# Altium PCB PCB1.PcbDoc
Units mil, origin at the board's own origin, x right, y up, seen from the top; angles counter-clockwise.
Board outline 1860 x 2320 mil, 2 copper layers (Top Layer, Bottom Layer); 16 components, 11 nets, 65 pads, 6 vias.
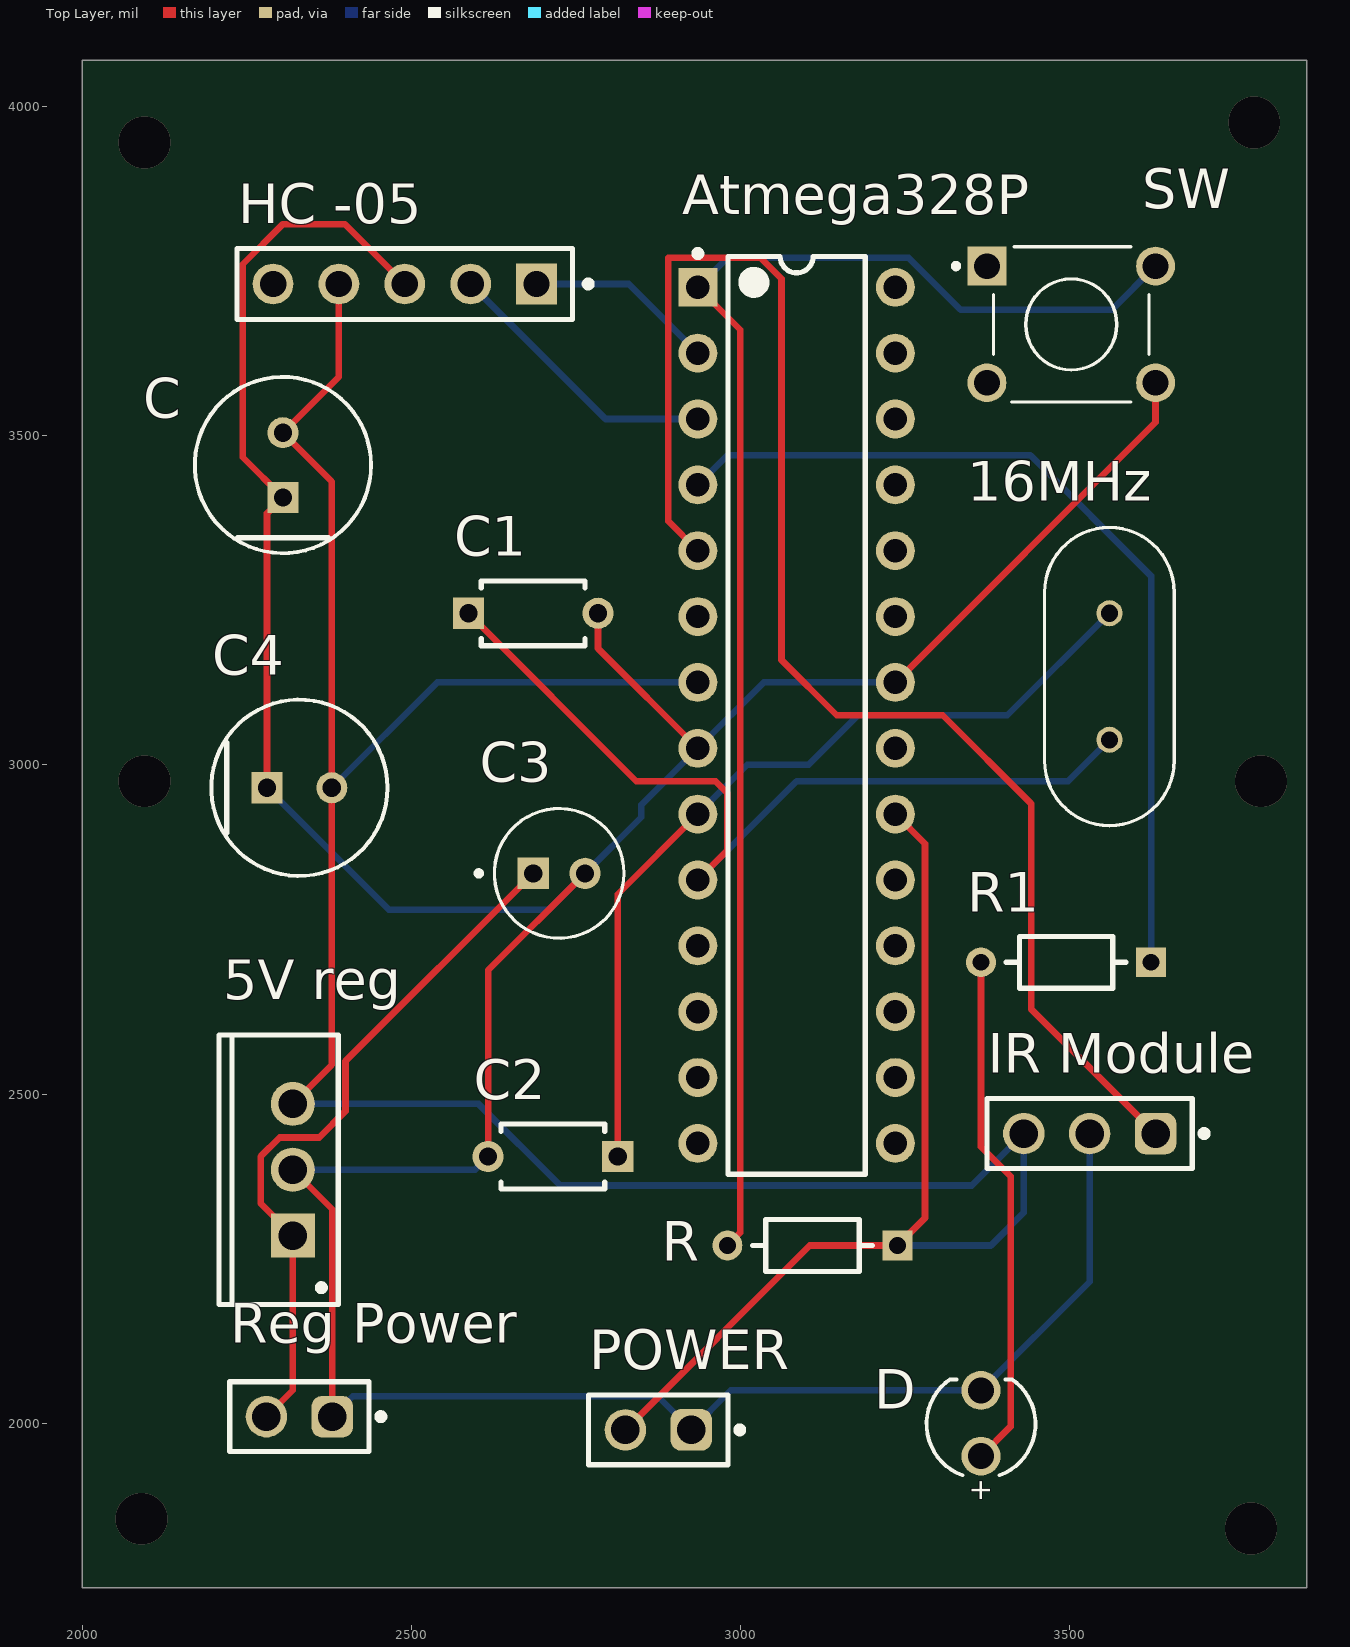
[diagram p0: Top Layer view]
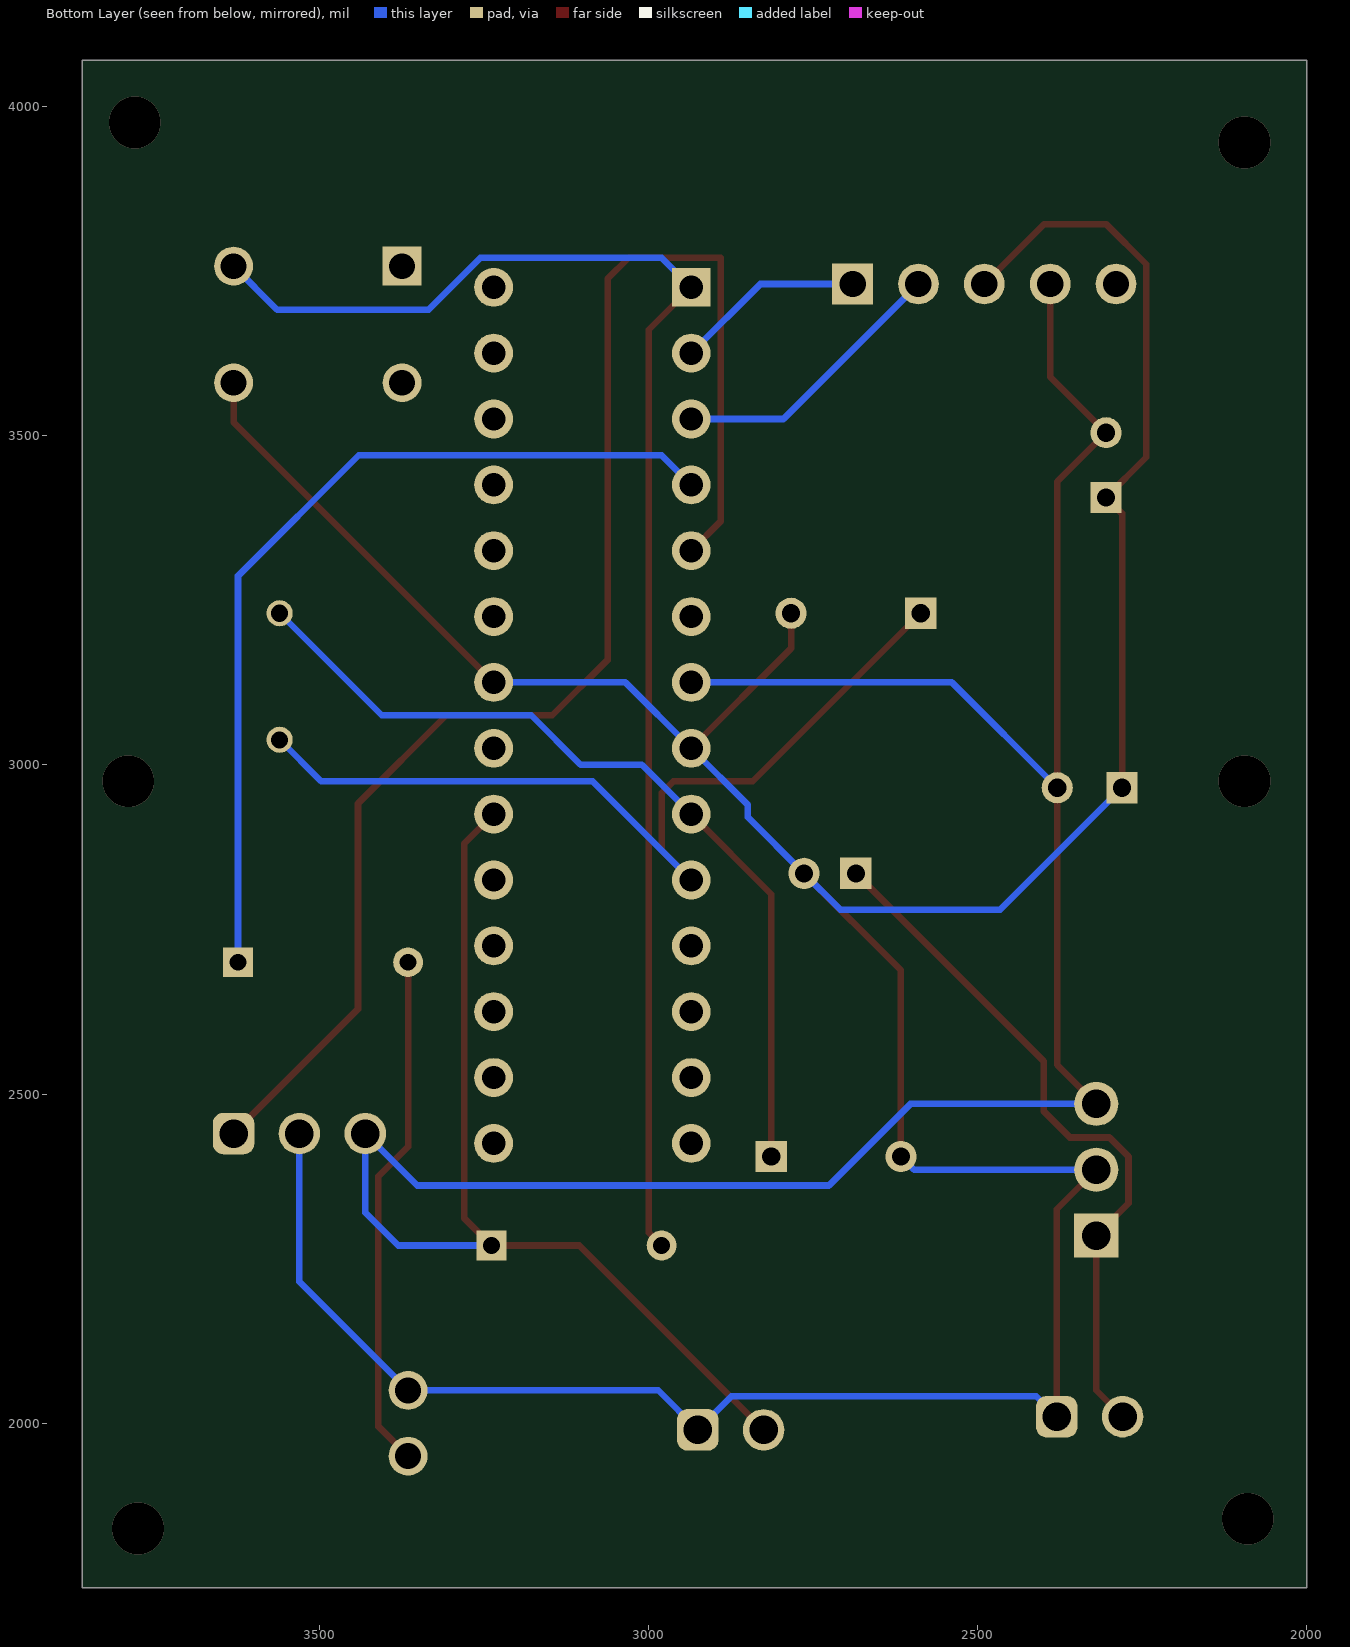
[diagram p1: Bottom Layer view, seen from below]
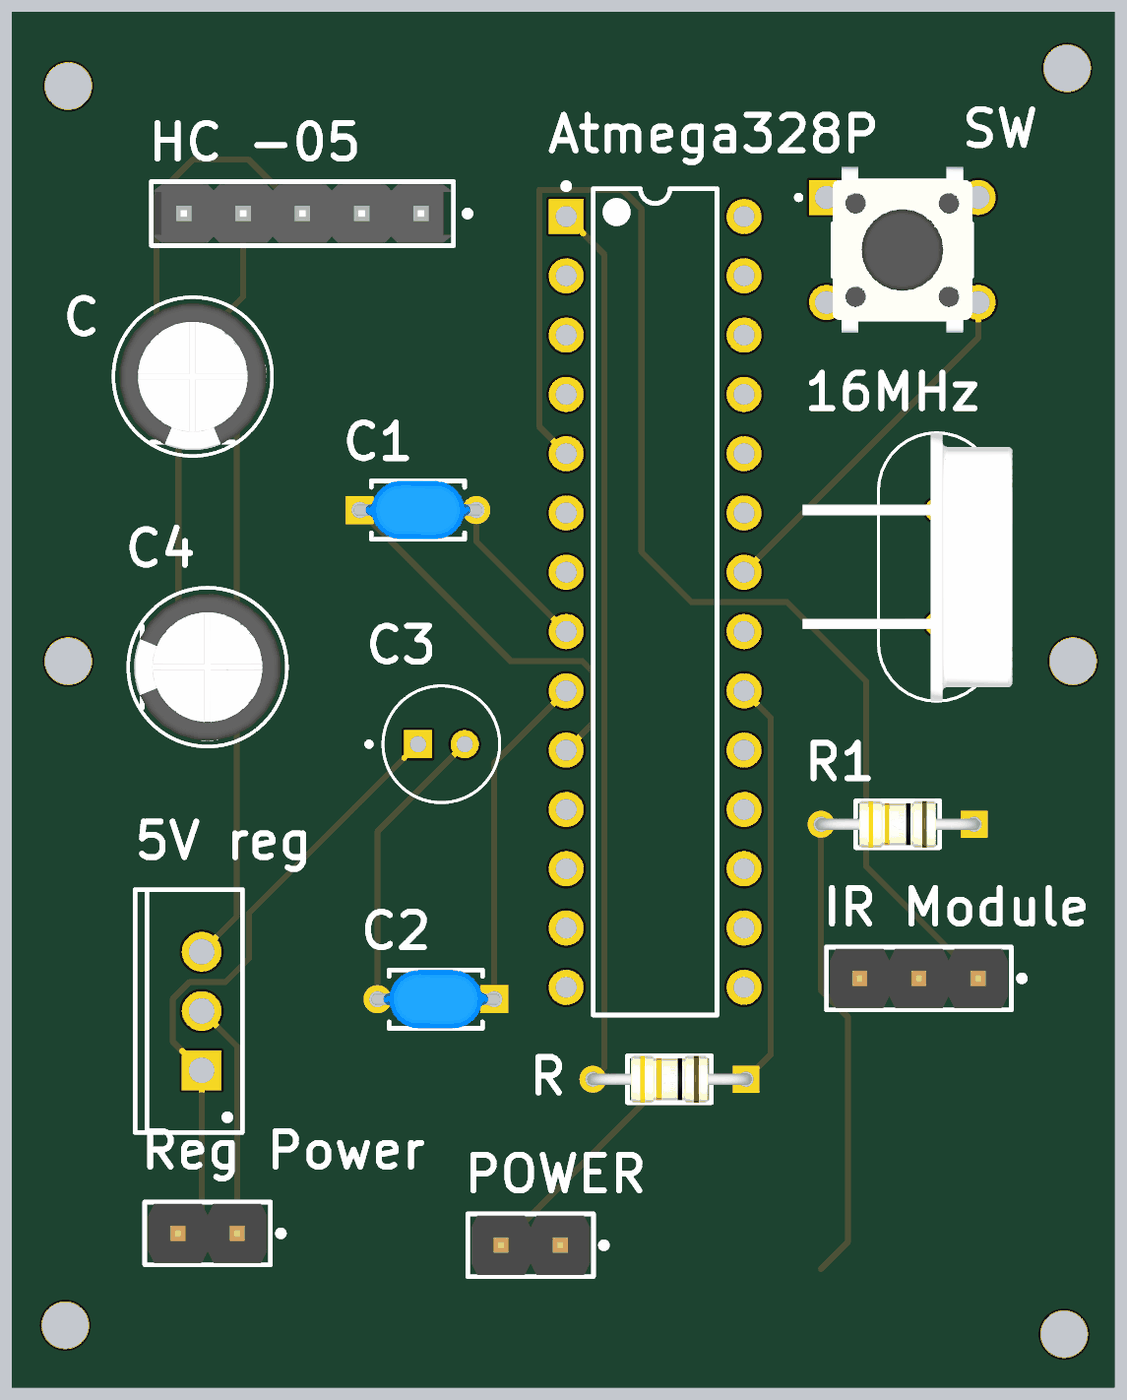
[diagram p2: 3D render of the assembled board from above, using the file's embedded part models]

## Layer stack, top to bottom
Top Solder: solder mask 0.4, Solder Resist, Dk 3.5
Top Layer: signal copper 1.4
Dielectric 1: dielectric 12.6, FR-4, Dk 4.8
Bottom Layer: signal copper 1.4
Bottom Solder: solder mask 0.4, Solder Resist, Dk 3.5

## Board outline
2000,1750 3860,1750 3860,4070 2000,4070

## Design rules (kind name [scope] priority, off if disabled: settings)
Clearance [All] p1: gap=10 ignorepadtopadclearanceinfootprint=FALSE
PolygonConnect [All] p1: connectstyle=Relief reliefconductorwidth=10 reliefentries=4 polygonreliefangle="90 Angle" airgapwidth=10
RoutingVias [All] p1: holewidth=28 width=50 viastyle="Through Hole" minholewidth=28 minwidth=50 maxholewidth=28 maxwidth=50
SolderMaskExpansion [All] p1: expansion=4 istentingtop=FALSE
Width [All] p1: maxlimit=10 minlimit=10 preferedwidth=10
30 further rules are at their usual default settings.

## Components (designator, comment, footprint, x,y, rotation, side; value= is the part's Value field where it differs from the comment)
"5V reg" "L7805CV" TO220 2320,2385 r90 top
16MHz "ABL-16.000MHZ-B2" XTAL_HC49P488W46L1150T500H350 3560,3133.94 r90 top
Atmega328P "ATmega328P-PU" 28P3 3085,3075 r0 top
C "0.1uF" FP-RAD-TH-D_6_3_0_5-L_11-MFG 2305,3455 r90 top
C1 "RDE5C2A220J0M1H03A" FP-RDE0M1-MFG 2685,3230 r0 top
C2 "RDE5C2A220J0M1H03A" FP-RDE0M1-MFG 2715,2405 r180 top
C3 "0.33uF" CAPPRD200W50D550H1250 2724.37,2835 r0 top
C4 "0.1uF" FP-RAD-TH-D_6_3_0_5-L_11-MFG 2330,2965 r0 top
D "151031VS06000" WL-TMRC_D3.95H5.3 -46635,52000 r90 top
"HC -05" "22-28-4050" FP-22-28-4050-MFG 2490,3730 r180 top
"IR Module" "61300311121" 61300311121 3530,2440 r180 top
POWER "61300211121" 61300211121 2875,1990 r180 top
R "10k" FP-CF18-MFG 3109.13,2270 r180 top value=10kΩ
R1 "CF18JT10K0" FP-CF18-MFG 3494.13,2700 r180 top value=10kΩ
"Reg Power" "61300211121" 61300211121 2330,2010 r180 top
SW "1825910-6" SW_1825910-6-4 3502.05,3668.58 r0 top

## Footprints (in the part's own frame and the unit in brackets; to place one, negate y for a bottom-side part, rotate by r counter-clockwise, add the part's x,y. Pads: shape width x height; smd on the part's side, far side on the other; paste and mask are expansions set on the pad)
28P3 [mm] "28-Pin Plastic Dual In-Line Package (PDIP)"
  rect 1.5x1.5 hole 0.9: 1(-3.81,16.51)
  round 1.5 hole 0.9: 2(-3.81,13.97) 3(-3.81,11.43) 4(-3.81,8.89) 5(-3.81,6.35) 6(-3.81,3.81) 7(-3.81,1.27) 8(-3.81,-1.27) 9(-3.81,-3.81) 10(-3.81,-6.35) 11(-3.81,-8.89) 12(-3.81,-11.43) 13(-3.81,-13.97) 14(-3.81,-16.51) 15(3.81,-16.51) 16(3.81,-13.97) 17(3.81,-11.43) 18(3.81,-8.89) 19(3.81,-6.35) 20(3.81,-3.81) 21(3.81,-1.27) 22(3.81,1.27) 23(3.81,3.81) 24(3.81,6.35) 25(3.81,8.89) 26(3.81,11.43) 27(3.81,13.97) 28(3.81,16.51)
  silkscreen extent -3.93,-17.7 2.65,17.93, body extent -3.6,-17.65 3.6,17.65, height 4.58
61300211121 [mm] "Pin Header, pitch 2.54 mm, THT, Vertical, single row, 2p"
  rrect50% 1.6x1.6 hole 1.1: 1(-1.27,0)
  round 1.6 hole 1.1: 2(1.27,0)
  silkscreen extent -3.26,-1.34 2.69,1.34, body extent -2.54,-1.27 2.54,1.27, height 8.57
61300311121 [mm] "Pin Header, pitch 2.54 mm, THT, Vertical, single row, 3p"
  rrect50% 1.6x1.6 hole 1.1: 1(-2.54,0)
  round 1.6 hole 1.1: 2(0,0) 3(2.54,0)
  silkscreen extent -4.53,-1.34 3.96,1.34, body extent -3.81,-1.27 3.81,1.27, height 8.57
CAPPRD200W50D550H1250 [mm]
  rect 1.208x1.208 hole 0.7: 1(-1,0)
  round 1.208 hole 0.7: 2(1,0)
  silkscreen extent -3.2,-2.5 2.5,2.5
FP-22-28-4050-MFG [mm]
  rect 1.57x1.57 hole 1.02 paste-2539.97 mask+0: 1(-5.08,0)
  round 1.57 hole 1.02 paste-2539.97 mask+0: 2(-2.54,0) 3(0,0) 4(2.54,0) 5(5.08,0)
  silkscreen extent -7.2,-1.37 6.48,1.37, body extent -6.58,-1.47 6.58,1.47, height 0.25
FP-CF18-MFG [mm]
  rect 1.15x1.15 hole 0.65 paste-2539.97 mask+0: 1(-3.28,0)
  round 1.15 hole 0.65 paste-2539.97 mask+0: 2(3.28,0)
  silkscreen extent -2.31,-1 2.3,1, body extent -3.96,-1.1 3.96,1.1, height 0.25
FP-RAD-TH-D_6_3_0_5-L_11-MFG [mm]
  rect 1.2x1.2 hole 0.7 paste-2539.97 mask+0: 1(-1.25,0)
  round 1.2 hole 0.7 paste-2539.97 mask+0: 2(1.25,0)
  silkscreen extent -3.4,-3.4 3.4,3.4, body extent -3.5,-3.5 3.5,3.5, height 0.25
FP-RDE0M1-MFG [mm]
  rect 1.2x1.2 hole 0.7 paste-2539.97 mask+0: 1(-2.5,0)
  round 1.2 hole 0.7 paste-2539.97 mask+0: 2(2.5,0)
  silkscreen extent -2,-1.25 2,1.25, body extent -3.2,-1.35 3.2,1.35, height 0.25
SW_1825910-6-4 [mm]
  rect 1.498x1.498 / inner round 1.498 / far side rect 1.498x1.498 hole 0.99: 1(-3.25,2.25)
  round 1.498 hole 0.99: 2(3.25,2.25) 3(-3.25,-2.25) 4(3.25,-2.25)
  silkscreen extent -4.54,-2.99 3,2.99, body extent -3,-3.9 3,3.9, height 5.01
TO220 [mm] "TO, Thru-Hole, Vertical, Heatsink Mounted; 3 In-Line Leads; Pitch 2.54 mm"
  rect 1.7x1.7 hole 1.1: 1(-2.54,0)
  round 1.7 hole 1.1: 2(0,0) 3(2.54,0)
  silkscreen extent -5.2,-1.75 5.2,2.85, body extent -5.25,-1.8 5.25,2.9, height 19.7
WL-TMRC_D3.95H5.3 [mm] "THT Mono-color Round Color LED, 2-leads"
  round 1.5 hole 1: 1(-1271.27,-1270) 2(-1268.73,-1270)
  silkscreen extent -1272,-1272.1 -1268.31,-1267.9, body extent -1271.99,-1271.97 -1268.37,-1268.03, height 5.35
XTAL_HC49P488W46L1150T500H350 [mm]
  round 1.007 hole 0.657: 1(-2.44,0) 2(2.44,0)
  silkscreen extent -5.75,-2.5 5.75,2.5, body extent -5.75,-3.25 5.75,5.75, height 2.5

## Part data
"5V reg": library part CMP-0244-00483-1, "Positive Voltage Regulator, 5V, 3-Pin TO-220", ComponentLink1Description="Manufacturer URL", ComponentLink1URL=http://www.st.com, ComponentLink2Description=Datasheet, ComponentLink2URL=http://www.st.com/internet/com/TECHNICAL_RESOURCES/TECHNICAL_LITERATURE/DATASHEET/CD00000444.pdf, ComponentLink3Description="Package Specification", ComponentLink3URL=http://www.st.com/internet/com/TECHNICAL_RESOURCES/TECHNICAL_LITERATURE/PACKAGE_INFORMATION/CD00004649.pdf, DatasheetVersion=16/11/2011, PackageDescription="TO, Thru-Hole, Vertical, Heatsink Mounted; 3 In-Line Leads; Pitch 2.54 mm", PackageReference=TO220, PackageVersion=ver3.0
16MHz: "HC/49US (AT49) MICROPROCESSOR CRYSTAL", Package="HC-49/US ABRACON", Availability="In Stock", Check_prices=https://www.snapeda.com/parts/ABL-16.000MHZ-B2/Abracon+LLC/view-part/?ref=eda, MF=Abracon, MP=ABL-16.000MHZ-B2, Price=None, Purchase-URL=https://pricing.snapeda.com/search/part/ABL-16.000MHZ-B2/?ref=eda, SnapEDA_Link=https://www.snapeda.com/parts/ABL-16.000MHZ-B2/Abracon+LLC/view-part/?ref=snap
Atmega328P: library part CMP-0095-00013-2, "8-bit AVR Microcontroller, 32KB Flash, 1KB EEPROM, 2KB SRAM, 28-pin PDIP, Industrial Grade (-40°C to 85°C)", ComponentLink1Description="Manufacturer URL", ComponentLink1URL=http://www.atmel.com/, ComponentLink2Description="ATmega48A/48PA/88A/88PA/168A/168PA/328/328P Datasheet", ComponentLink2URL=http://www.atmel.com/dyn/resources/prod_documents/8271.pdf, ComponentLink3Description="ATmega48A/48PA/88A/88PA/168A/168PA/328/328P Summary", ComponentLink3URL=http://www.atmel.com/dyn/resources/prod_documents/8271S.pdf, DatasheetVersion="revD, May-2011", PackageDescription="28-lead (0.300\"/7.62mm Wide) Plastic Dual Inline Package (PDIP)", PackageReference=28P3, PackageVersion="revB, Sep-2001", RevisionNote="DatasheetVersion updated. URLs added."
C C4: library part CMP-05427-001214-1, "Aluminum Electrolytic Capacitors (Radial Lead Type) 330uF ±20% 6.3V", Capacitance=330uF, Case/Package=Radial, ESR (Equivalent Series Resistance)=130mR, Max Operating Temperature=105°C, Min Operating Temperature=-40°C, Package Quantity=2000, Ripple Current=455mA, Tolerance=20%, Voltage Rating=6.3V, Diameter=6.3mm, Features="General Purpose", Height=11.2mm, Height - Seated (Max)=0.5inch, Impedance=130mR, Lead Diameter=0.5mm, Lead Pitch=5mm, Length=11.2mm, Life (Hours)=2000Hour, Mount="Through Hole", Packaging="Ammo Pack", Polarity=Polar, Radiation Hardening=No, RoHS Compliant=Yes, Series=FR, Termination=Radial, Voltage Rating (DC)=6.3V
C1 C2: library part CMP-06035-022985-1, "Ceramic Capacitor 22pF ±5% 100V C0G Radial", Capacitance=22pF, Case/Package=Radial, Dielectric=C0G, Max Operating Temperature=125°C, Min Operating Temperature=-55°C, Package Quantity=1, Resistor Type=Ceramic, Tolerance=5%, Voltage Rating=100V, Height=3.5mm, Height - Seated (Max)=0.236inch, Lead Diameter=0.5mm, Lead Free="Lead Free", Lead Pitch=0.197inch, Length=0.157inch, Mount="Through Hole", Packaging="Cut Tape", Termination=Radial, Voltage Rating (DC)=100V, Width=0.098inch
C3: library part UVR2AR33MDD, "CAP ALUM 0.33UF 20% 100V RADIAL", Package="Radial Nichicon", Availability=Warning, Check_prices=https://www.snapeda.com/parts/UVR2AR33MDD/Nichicon/view-part/2320026/?ref=eda, DigiKey-Purchase-URL=https://snapeda.com/shop?store=DigiKey&id=2320026, MF=Nichicon, Mouser-Purchase-URL=https://snapeda.com/shop?store=Mouser&id=2320026, MP=UVR2AR33MDD, Price=None, SnapEDA_Link=https://www.snapeda.com/parts/UVR2AR33MDD/Nichicon/view-part/2320026/?ref=snap
D: library part CMP-1488-00004-2, Case/Package=Radial, Color=Green, Forward Current=100mA, Forward Voltage=2.2V, Max Operating Temperature=85°C, Max Reverse Voltage (DC)=5V, Min Operating Temperature=-40°C, Test Current=20mA, Dominant Wavelength=568nm, Height=5.3mm, Lead Free="Lead Free", Length=3mm, Lens Size=3mm, Lens Style="Circular, Diffused, Round", Luminous Intensity=30mcd, Mount="Through Hole", NexarPartId=29717805, Packaging=Bulk, Peak Wavelength=560nm, REACH SVHC=Unknown, RoHS=Compliant, Viewing Angle=60°, Wavelength=568nm, Width=3mm
"HC -05": library part CMP-00257-00278173-1, "22-28-4050 KK® 254 Breakaway Header, Vertical, 5 Circuits, Tin (Sn) Plating, Mating Pin Length 6.09mm", Color=Black, Contact Resistance=20mΩ, Current Rating=4A, Flammability Rating="UL94 V-0", Max Operating Temperature=75°C, Max Voltage Rating (DC)=250.25kV, Min Operating Temperature=0°C, Voltage Rating=250V, Connector Type="Male Pin", Contact Material=Brass, Contact Mating Length=6.096mm, Contact Plating=Tin, Gender=Male, Glow Wire Compliant=Non-compliant, Height=2.29mm, Housing Color=Black, Housing Material=Thermoplastic, Lead Free="Lead Free", Lead Pitch=2.54mm, Length=12.7mm, Mount="Through Hole", NexarPartId=278173, Number of Circuits=5, Number of Contacts=5, Number of Positions=5, Number Of Rows=1, Orientation=Vertical, Packaging=Bulk, Pitch=2.54mm, Radiation Hardening=No, REACH SVHC=Unknown, RoHS=Compliant, Schedule B=8536694040, Termination=Solder, Voltage Rating (DC)=250V, Width=2.49mm
"IR Module": library part CMP-1502-01062-3, Color=Black, Contact Resistance=20mΩ, Current Rating=3A, Max Operating Temperature=105°C, Min Operating Temperature=-40°C, Operating Supply Voltage=250V, Connector Type="Male Pin", Contact Material=Copper, Contact Mating Length=5.9944mm, Contact Plating=Gold, Gender=Male, Height=8.94mm, Lead Free="Lead Free", Lead Pitch=2.54mm, Mount="Through Hole", NexarPartId=32855521, Number of Contacts=3, Number of Pins=3, Number of Positions=3, Number Of Rows=1, Orientation=Vertical, Packaging=Bulk, Pitch=2.54mm, REACH SVHC=Unknown, RoHS=Compliant, Termination=Solder, Voltage Rating=250V
POWER "Reg Power": library part CMP-1712-00002-6, Color=Black, Contact Resistance=20mΩ, Current Rating=3A, Max Operating Temperature=125°C, Min Operating Temperature=-40°C, Operating Supply Voltage=250V, Connector Type="Male Pin", Contact Gender=Male, Contact Material=Copper, Contact Mating Length=5.9944mm, Contact Plating=Gold, Gender=Male, Height=8.94mm, Housing Material=PBT, Lead Free="Lead Free", Lead Pitch=2.54mm, Mount="Through Hole", NexarPartId=20081794, Number of Contacts=2, Number of Pins=2, Number of Positions=2, Number Of Rows=1, Orientation=Vertical, Packaging=Bulk, Pitch=2.54mm, REACH SVHC="No SVHC", RoHS=Compliant, Termination="Through Hole", Voltage Rating=250V
R: library part CMP-26528-000002-1, "RES 10K OHM 1/8W 5% CF AXIAL", Manufacturer="Stackpole Electronics", Manufacturer Part Number=CF18JT10K0, Package=CF18, Power Rating=0.125W, Resistance=10kΩ, Temperature="-55°C to +155°C", Temperature Coefficient=0-500ppm/°C, Temperature Range High=+155°C, Temperature Range Low=-55°C, Tolerance=5%, Voltage Rating=250V, Automotive=No, Category=Res, ComponentLink2Description=Datasheet, ComponentLink2URL=http://www.seielect.com/Catalog/SEI-CF_CFM.pdf, Composition="Carbon Film", Device Class L1="Passive Components", Device Class L2=Resistors, Device Class L3="Through-Hole Resistors", Digikey Description="RES 10K OHM 1/8W 5% CF AXIAL", Height=2mm, Ipc Land Pattern Name=RESAD656W65L360D200, Lead Free=Yes, Octopart=https://octopart.com/cf18jt10k0-stackpole+electronics-19205642, RoHS=TRUE, Series=CF
R1: library part CMP-26528-000002-1, "RES 10K OHM 1/8W 5% CF AXIAL", Manufacturer="Stackpole Electronics", Package=CF18, Power Rating=0.125W, Resistance=10kΩ, Temperature="-55°C to +155°C", Temperature Coefficient=0-500ppm/°C, Temperature Range High=+155°C, Temperature Range Low=-55°C, Tolerance=5%, Voltage Rating=250V, Automotive=No, Category=Res, ComponentLink2Description=Datasheet, ComponentLink2URL=http://www.seielect.com/Catalog/SEI-CF_CFM.pdf, Composition="Carbon Film", Device Class L1="Passive Components", Device Class L2=Resistors, Device Class L3="Through-Hole Resistors", Digikey Description="RES 10K OHM 1/8W 5% CF AXIAL", Height=2mm, Ipc Land Pattern Name=RESAD656W65L360D200, Lead Free=Yes, Manufacturer Part Number=CF18JT10K0, Octopart=https://octopart.com/cf18jt10k0-stackpole+electronics-19205642, RoHS=TRUE, Series=CF
SW: "Switch Push Button OFF (ON) SPST Round Button 0.05A 24VDC Momentary Contact PC Pins Thru-Hole", Package=None, Check_prices=https://www.snapeda.com/parts/1825910-6/TE+Connectivity+ALCOSWITCH+Switches/view-part/?ref=eda, Digi-Key_Part_Number=450-1650-ND, MF="TE Connectivity", MP=1825910-6, Purchase-URL=https://pricing.snapeda.com/search/part/1825910-6/?ref=eda, SnapEDA_Link=https://www.snapeda.com/parts/1825910-6/TE+Connectivity+ALCOSWITCH+Switches/view-part/?ref=snap

## Via types
v1: diameter 78.74, hole 78.74, Top Layer to Bottom Layer, 6 vias

## Nets (pads, with @x,y where several pads share a name; then routed paths per layer and width w, separated by ;. In a path a pad name is that pad's centre, name@x,y a point inside that pad or via, vN(x,y) a via of type N, cw(c..) or ccw(c..) an arc to the next point about the centre after c; other vN are vias at no path point)
+5: "5V reg.3" "HC -05.4" "IR Module.3" Atmega328P.7 Atmega328P.20 C4.2 C.2 POWER.2 R.1 | length 4704.2
  Top Layer w10: 2320,2485 2379.21,2544.21 C4.2 2379.21,3430 C.2 2390,3589.21 2390,3730 ; POWER.2 3105,2270 R.1 3280,2311.73 3280,2880 Atmega328P.20
  Bottom Layer w10: 2320,2485 2602,2485 2726,2361 3351,2361 3430,2440 3430,2320 3380,2270 R.1 ; C4.2 2539.21,3125 Atmega328P.7
D2: Atmega328P.4 R1.1 | length 1369.6
  Bottom Layer w10: Atmega328P.4 2980,3470 3440,3470 3623.27,3286.73 R1.1
D3: "IR Module.1" Atmega328P.5 | length 2276.5
  Top Layer w10: Atmega328P.5 2890,3370 2890,3770 3030,3770 3062,3738 3062,3159 3146,3075 3307,3075 3441,2941 3441,2629 3630,2440
GND: "5V reg.2" "HC -05.3" "IR Module.2" "Reg Power.1" Atmega328P.8 Atmega328P.22 C1.2 C2.2 C3.2 C4.1 C.1 D.2 POWER.1 SW.4 | length 5908.2
  Top Layer w10: C4.1 2280.79,3381.58 C.1 2244,3466.79 2244,3760 2305,3821 2399,3821 2490,3730 ; 2320,2385 2380,2325 2380,2010 ; C2.2 2616.57,2687.83 C3.2 ; C1.2 2783.43,3176.57 Atmega328P.8 ; Atmega328P.22 3630,3520 SW.4
  Bottom Layer w10: C4.1 2465.79,2780 2708.74,2780 C3.2 2849,2920.26 2849,2939 Atmega328P.8 3035,3125 Atmega328P.22 ; 2320,2385 2596.57,2385 C2.2 ; 2380,2010 2411,2041 2874,2041 POWER.1 2985,2050 D.2 3530,2215 3530,2440
"Net5V reg_1": "5V reg.1" "Reg Power.2" C3.1 | length 1068.5
  Top Layer w10: 2280,2010 2320,2050 2320,2285 2271,2334 2271,2405 2300,2434 2360,2434 2400,2474 2400,2550 C3.1
Net16MHz_1: 16MHz.1 Atmega328P.10 C1.1 | length 1369.9
  Top Layer w10: C1.1 2841.57,2975 2962,2975 2979.53,2957.47 2979.53,2869.53 Atmega328P.10
  Bottom Layer w10: Atmega328P.10 3085,2975 3497.13,2975 16MHz.1
Net16MHz_2: 16MHz.2 Atmega328P.9 C2.1 | length 1321.7
  Top Layer w10: C2.1 2813.43,2803.43 Atmega328P.9
  Bottom Layer w10: Atmega328P.9 3010,3000 3103,3000 3178,3075 3405,3075 16MHz.2
NetD_1: D.1 R1.2 | length 787.3
  Top Layer w10: D.1 3410,1995 3410,2375 3365,2420 R1.2
RESET: Atmega328P.1 R.2 SW.2 | length 2263.6
  Top Layer w10: Atmega328P.1 2999.53,3660.47 2999.53,2289.53 R.2
  Bottom Layer w10: Atmega328P.1 2980,3770 3255,3770 3334,3691 3563.83,3691 SW.2
RXD: "HC -05.1" Atmega328P.2 | length 288.5
  Bottom Layer w10: 2690,3730 2830,3730 Atmega328P.2
TXD: "HC -05.2" Atmega328P.3 | length 429.9
  Bottom Layer w10: 2590,3730 2795,3525 Atmega328P.3
pads on no net: "HC -05.5" Atmega328P.6 Atmega328P.11 Atmega328P.12 Atmega328P.13 Atmega328P.14 Atmega328P.15 Atmega328P.16 Atmega328P.17 Atmega328P.18 Atmega328P.19 Atmega328P.21 Atmega328P.23 Atmega328P.24 Atmega328P.25 Atmega328P.26 Atmega328P.27 Atmega328P.28 SW.1 SW.3
copper on no net:
  other v1: 3775,1840 2090,1855 2095,2975 3790,2975 2095,3945 3780,3975

## Text inside footprints (layer, text, board x,y; h text height)
D: Top Overlay "+" at 3378.78,1879.92 h31.5 r90